# Altium PCB Central_Unit_AgOpenGPS.pcbdoc (part 2 of 4)
Units mm, origin at the board's own origin, x right, y up, seen from the top; angles counter-clockwise.
Board outline 200.19 x 122.57 mm, 2 copper layers (Top Layer, Bottom Layer); 278 components, 223 nets, 1042 pads, 421 vias.
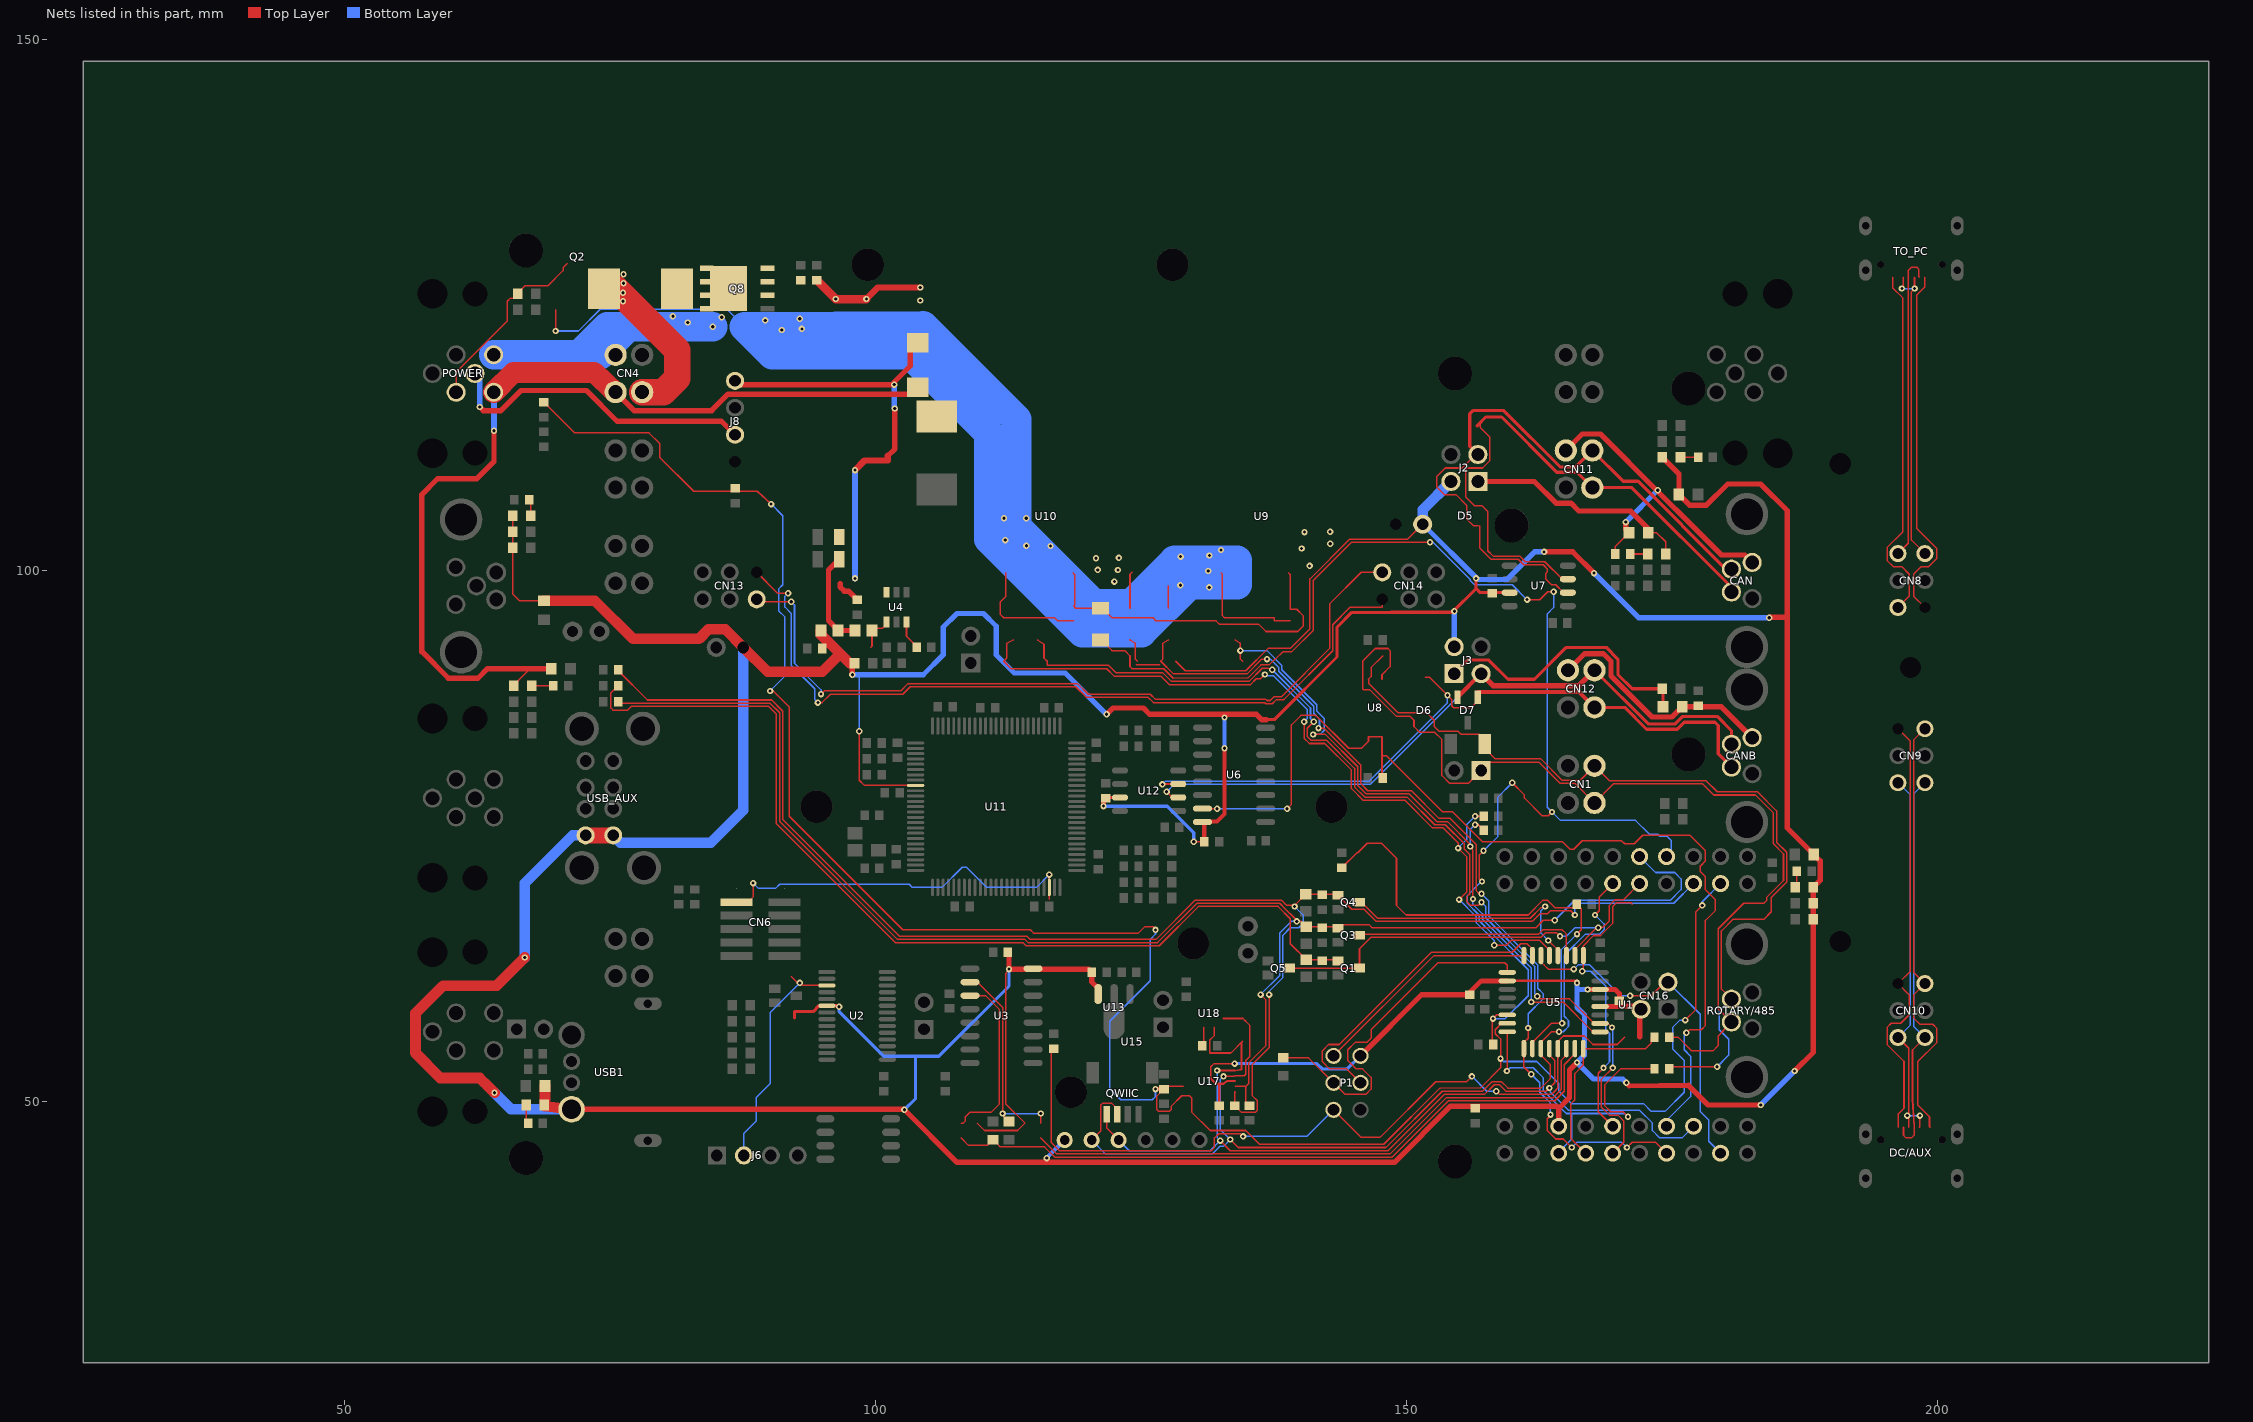
[diagram p2: the nets of this part, all layers, seen from the top]

## Via types
v1: diameter 0.6, hole 0.3, Top Layer to Bottom Layer, 420 vias
v2: diameter 0.61, hole 0.305, Top Layer to Bottom Layer, 1 vias

## Nets (pads, with @x,y where several pads share a name; then routed paths per layer and width w, separated by ;. In a path a pad name is that pad's centre, name@x,y a point inside that pad or via, vN(x,y) a via of type N, cw(c..) or ccw(c..) an arc to the next point about the centre after c; other vN are vias at no path point) (continued)
+5V: 5V.2 C2.1 C4.1 C11.1 C14.1 C22.1 C26.1 C34.1 C35.1 C40.1 C53.1 C56.1 CHA.2 CHB.2 CN7.1 CN16.2 F1.2 F5.1 F6.1 F7.1 FGNSS.1 FROT.1 FSER.1 FWAS.1 J1.2 J2.2 J3.2 L8.2 P1.2 R6.2 R22.2 R23.2 R48.1 U1.31 U2.20 U3.16 U5.4 U5.6 U5.18 U6.16 U7.3 U11.9 U12.3 U13.3 U15.1 U17.8 USB1.1 USB_AUX.1 USB_AUX.5 WAS1.2 WAS2.2 | length 679.6
  Top Layer w0.145: FWAS.1@65.837,105.166 65.837,97.815 66.488,97.165 F5.1@68.786,97.165 ; FGNSS.1@68.837,49.666 68.887,49.716 F1.2@68.887,51.466 ; v1(98.486,84.866) 98.486,80.267 98.987,79.766 U11.9@103.787,79.766 ; R22.2@109.587,47.966 110.287,47.266 110.487,47.266 ; R48.1@128.287,91.466 129.187,90.566 134.887,90.566 136.988,92.667 139.088,92.667 140.937,94.516 140.937,99.217 144.687,102.967 150.158,102.967 J1.2@151.557,104.366 ; v1(129.987,74.466) C4.1@130.987,74.466 ; 131.588,52.167 131.588,53.266 131.887,53.566 v1(133.837,53.566) ; CHB.2@188.337,67.166 188.337,70.166 188.887,70.716 188.887,72.766 F6.1@188.387,73.266
  Top Layer w0.15: 110.487,47.266 113.388,47.266 R23.2@114.087,47.966 112.286,49.766 112.287,62.066 v1(112.587,62.466) 112.632,62.511 U3.16@114.859,62.511
  Top Layer w0.2: 131.587,52.166 132.087,51.666 132.787,51.666 133.138,51.917 U17.8@133.89,51.917 ; C14.1@132.387,49.616 132.387,51.634 132.419,51.666
  Top Layer w0.25: U5.18@159.518,61.356 166.089,61.356 v1(166.087,61.166)
  Top Layer w0.3: C26.1@92.387,57.866 92.388,58.466 94.138,58.466 94.689,59.019 U2.20@95.442,59.018 ; U2.20@95.442,59.018 96.541,59.018 96.587,58.972 v1(96.587,58.916) ; C40.1@121.687,78.566 121.752,78.631 U12.3@123.047,78.631 ; 136.924,85.966 137.587,85.966 143.488,91.867 143.488,94.666 144.887,96.065 148.588,96.065 ; 148.588,96.075 154.346,96.075 156.586,98.316 ; v1(156.587,99.266) 156.586,98.316 ; U7.3@159.33,97.927 156.975,97.927 156.586,98.316
  Top Layer w0.4: U6.16@130.815,76.321 U6.16@130.987,76.149 ; C4.1@130.987,74.466 U6.16@130.987,76.149 ; v1(132.887,83.266) 132.888,77.066 132.187,76.365 130.988,76.365 U6.16@130.988,76.149
  Top Layer w0.45: C22.1@155.987,60.066 155.987,60.267 157.077,61.356 U5.18@159.518,61.356 ; U5.4@168.255,58.948 170.087,58.948 170.087,60.166 169.688,60.546 ; U5.6@168.255,60.546 169.667,60.546
  Top Layer w0.5: 70.087,49.167 70.386,49.266 102.688,49.266 107.686,44.267 148.888,44.267 154.186,49.566 164.148,49.566 164.366,49.347 ; v1(97.837,90.191) 5V.2@97.837,91.266 ; C35.1@112.487,64.066 112.587,63.966 v1(112.587,62.466) 120.087,62.466 C53.1@120.387,62.166 ; C53.1@120.386,62.166 120.386,61.265 120.988,60.665 U13.3@120.988,60.114 ; v1(121.487,77.816) 121.487,78.366 C40.1@121.687,78.566 ; v1(121.787,86.466) 122.387,87.066 125.252,87.066 125.851,86.466 135.887,86.466 136.387,85.966 136.837,85.966 ; P1.2@145.699,54.298 151.467,60.066 C22.1@155.987,60.066 ; v1(162.987,101.766) 165.687,101.766 v1(167.687,99.766) ; U1.31@164.366,47.666 164.366,49.347 ; v1@166.086,53.665 165.388,52.967 165.388,50.366 164.366,49.347 ; v1(167.087,60.547) U5.6@168.256,60.547 ; C34.1@170.087,59.466 170.087,58.966 171.885,58.966 171.986,58.864 171.986,56.065 ; v1(170.737,51.766) 170.987,51.466 176.586,51.516 178.438,49.667 v1(183.387,49.666) ; FSER.1@174.137,110.666 175.687,109.116 F7.1@175.687,107.166 176.688,106.167 178.288,106.167 180.287,108.166 183.388,108.166 185.888,105.667 185.888,75.766 F6.1@188.387,73.266 188.987,72.666 188.987,70.816 188.337,70.166 188.337,54.616 ; v1(184.187,95.566) 184.23,95.608 185.888,95.608 ; v1(186.587,52.866) 188.337,54.616 ; 188.337,55.481 188.337,54.616
  Top Layer w1: 62.711,52.21 63.478,51.476 v1(64.137,50.816) ; 62.737,52.216 59.038,52.215 56.688,54.564 56.688,58.316 59.287,60.917 64.339,60.917 v1(66.987,63.566) ; F5.1@68.786,97.165 73.587,97.165 77.186,93.566 83.386,93.566 84.288,94.465 85.858,94.465 CN7.1@87.557,92.766 89.858,90.465 94.986,90.465 96.688,92.166 ; F1.2@68.887,51.466 68.888,49.566 USB1.1@71.387,49.266 ; L8.2@94.887,94.366 94.887,93.966 96.687,92.166 ; 5V.2@97.837,91.266 97.587,91.266 96.687,92.166
  Top Layer w1.5: USB_AUX.1@72.712,75.066 USB_AUX.5@75.313,75.066
  Bottom Layer w0.145: v1(98.486,84.866) 98.486,90.191
  Bottom Layer w0.3: v1(96.587,58.916) 96.587,58.466 100.787,54.266 105.987,54.266 112.587,60.866 v1(112.587,62.466) ; v1(102.737,49.216) 103.787,50.266 103.787,54.266 ; v1@121.486,77.815 127.488,77.815 129.988,75.316 v1(129.987,74.466) ; v1(133.837,53.566) 141.587,53.566 142.087,53.066 144.467,53.066 P1.2@145.699,54.298
  Bottom Layer w0.4: v1(116.137,44.666) U15.1@117.837,46.366 ; v1(132.887,83.266) v1(132.887,86.166)
  Bottom Layer w0.5: v1@97.836,90.19 104.514,90.19 106.388,92.065 106.388,94.666 107.686,95.966 110.188,95.966 111.387,94.765 111.387,92.065 113.086,90.366 117.887,90.366 v1(121.787,86.466) ; J1.2@151.557,104.366 156.757,99.167 159.487,99.167 162.088,101.765 v1(162.987,101.766) ; J3.2@154.517,92.836 154.537,92.856 v1(154.537,96.166) ; 166.087,60.566 v1(166.087,61.166) ; v1(167.087,60.547) 166.205,60.546 166.086,60.665 166.086,58.867 166.787,58.166 166.787,54.366 166.086,53.665 167.635,52.116 170.386,52.116 v1(170.737,51.766) ; v1(167.687,99.766) 171.887,95.566 v1(184.187,95.566) ; v1(183.387,49.666) v1@186.587,52.866
  Bottom Layer w1: v1(64.137,50.816) 65.687,49.266 USB1.1@71.387,49.266 ; v1(66.987,63.566) 66.988,70.566 71.486,75.065 USB_AUX.1@72.712,75.066 ; USB_AUX.5@75.311,75.065 75.987,74.366 84.486,74.366 87.557,77.437 CN7.1@87.557,92.766 ; J1.2@151.557,104.366 151.557,105.736 J2.2@154.217,108.396
  other v1: 166.087,53.666
+BATT: CN4.2 D2.2 D3.1 F4.1 FINP.1 POWER.1 | length 90.3
  Top Layer w0.145: FINP.1@65.937,89.166 65.937,89.216 67.487,90.766 F4.1@69.487,90.766
  Top Layer w0.5: v1(64.087,113.166) 64.087,110.266 62.487,108.666 58.786,108.666 57.288,107.165 57.288,92.367 59.787,89.865 62.586,89.865 63.488,90.767 F4.1@69.487,90.766 ; CN4.2@75.538,116.817 77.288,115.067 84.588,115.067 86.137,116.616 103.338,116.616 D3.1@103.987,117.266
  Top Layer w2: POWER.1@64.054,116.797 65.924,118.666 73.513,118.666 CN4.2@75.487,116.817
  Bottom Layer w0.6: POWER.1@64.055,116.798 64.087,116.766 v1(64.087,113.166)
+MOTOR: C30.2 C31.1 CN4.1 D1.2 MOT.2 POWER.4 Q2.2 R35.1 R51.2 R53.2 U9.7 U10.7 | length 48.3
  Top Layer w0.145: POWER.4@60.519,116.798 60.519,118.697 65.337,123.515 65.337,125.367 65.639,125.666 66.338,125.666 MOT.2@66.337,126.066 ; MOT.2@66.338,126.073 66.338,126.167 66.988,126.815 69.137,126.815 70.587,128.266 70.587,128.521 Q2.2@70.971,128.905 ; R53.2@123.987,96.466 123.988,99.667 C30.2@124.187,99.866
  Top Layer w0.6: v1(99.155,125.578) 100.243,126.666 v1(104.237,126.666)
  Top Layer w0.8: R35.1@94.487,127.366 v1(96.275,125.578) v1(99.155,125.578)
  Top Layer w2.5: D1.2@74.452,126.566 75.537,126.566 81.352,120.751 81.352,118.13 80.038,116.817 CN4.1@78.037,116.816
  other v1: 122.517,98.967 122.842,100.062 120.947,100.072 140.904,100.444 120.779,101.161 122.939,101.198 140.152,102.081 142.842,102.524 140.425,103.624 142.833,103.662 76.237,125.366 104.238,125.44 76.237,126.166 76.287,127.066 76.287,127.916
+SMPS: C20.2 C21.2 L7.2 L8.1 R17.2 | length 9.6
  Top Layer w0.5: C20.2@96.688,101.166 95.588,100.063 95.587,95.316 L8.1@96.487,94.366 ; L8.1@96.787,94.272 96.586,94.267 L8.1@96.487,94.366 ; R17.2@98.087,94.366 L8.1@96.487,94.366
+VIN: C17.2 C18.2 C19.2 C32.1 D3.2 J8.4 U4.3 | length 43.9
  Top Layer w0.5: J8.4@86.787,117.876 87.148,117.516 v1(101.787,117.516) ; C17.2@96.687,98.766 96.688,98.466 97.087,98.067 97.488,98.067 C19.2@98.287,97.266 ; 101.187,110.816 101.837,111.466 v1(101.837,115.266) ; v1@101.786,117.516 101.786,117.767 103.287,119.266 103.287,121.465 D3.2@103.987,121.466
  Top Layer w0.6: v1(98.087,109.466) 98.987,110.366 101.186,110.366 101.186,110.815
  Bottom Layer w0.5: v1(101.787,117.516) 101.787,115.316 v1(101.837,115.266)
  Bottom Layer w0.6: v1(98.087,99.266) v1(98.087,109.466)
-MIN: CN4.4 D1.1 POWER.2 Q8.5 Q8.6 Q8.7 Q8.8 | length 27.4
  Bottom Layer w2.8: POWER.2@64.054,120.335 74.067,120.335 76.698,122.966 ; 72.162,120.348 74.793,122.979 ; 74.76,122.966 76.698,122.966 ; v1(84.687,122.966) 76.698,122.966
  other v1: 82.337,123.366 85.537,123.866 80.937,123.966
-MOTOR: C30.1 C31.2 Q8.2 Q8.3 Q8.4 R11.1 R12.1 R20.2 R21.2 R39.1 R49.1 R54.2 U9.1 U10.1 | length 178.8
  Top Layer w0.145: U10.1@112.277,99.782 112.277,97.556 111.787,97.066 111.787,95.866 112.087,95.566 116.888,95.566 R21.2@117.187,95.266 R20.2@118.687,95.266 ; R54.2@127.587,96.466 127.587,98.566 ; U9.1@132.577,99.782 132.688,99.672 132.688,95.766 132.888,95.565 137.587,95.565 R11.1@137.587,95.266 ; R11.1@137.587,95.266 R12.1@139.087,95.266
  Top Layer w0.15: v1(69.887,122.566) R49.1@69.887,124.566
  Bottom Layer w0.15: v1(69.887,122.566) 72.037,122.566 74.087,124.616 83.637,124.616 86.037,124.616 87.686,122.966
  Bottom Layer w2.8: 87.686,122.966 90.287,120.366 103.287,120.366 110.686,112.966 110.686,102.967 119.487,94.165 125.085,94.165 129.586,98.666 134.087,98.666 134.087,100.965 128.187,100.965 124.087,96.865 120.587,96.865 113.287,104.165 113.287,114.267 104.487,123.066 87.686,122.966
  other v1: 131.452,98.424 128.734,98.618 131.349,99.96 128.756,101.316 131.461,101.418 132.555,101.948 116.504,102.317 114.229,102.334 112.229,102.872 112.115,104.932 114.215,104.929 91.187,122.666 93.087,122.766 89.637,123.566 92.887,123.716
.8V: R17.1 R18.2 U4.4 | length 3.5
  Top Layer w0.145: R18.2@99.587,92.766 99.687,92.865 R17.1@99.687,94.366 99.887,94.566 100.687,94.566 101.037,94.915 U4.4@101.037,95.166
_RESET: C7.1 P1.5 R6.1 U5.29 | length 75.3
  Top Layer w0.145: C7.1@116.787,54.966 116.586,54.966 116.586,46.116 117.338,45.367 131.639,45.367 131.938,45.667 131.938,46.566 132.337,46.965 134.389,46.965 v1(134.637,46.716) ; P1.5@143.159,49.218 145.761,46.617 147.536,46.617 152.787,51.867 155.687,51.867 v1(156.187,52.366) ; v1(158.487,50.966) 158.787,50.666 160.387,50.666 163.687,50.666 163.887,50.866 164.281,51.26 U5.29@164.281,54.984 164.281,55.66 164.787,56.166 166.787,56.166 167.587,55.366 169.887,55.366 R6.1@170.587,56.066
  Bottom Layer w0.145: v1(134.637,46.716) 140.657,46.716 P1.5@143.159,49.218 ; v1(156.187,52.366) 157.587,50.966 v1(158.487,50.966)
_RESETNXP: CN6.10 U11.48 | length 35.8
  Top Layer w0.145: CN6.10@86.937,68.771 87.992,68.771 88.487,69.266 v1(88.487,70.566) ; 116.387,69.066 U11.48@116.387,70.166 v1(116.387,71.366)
  Bottom Layer w0.145: v1(88.487,70.566) 88.987,70.066 90.587,70.066 90.988,70.465 103.188,70.465 103.488,70.165 106.287,70.165 108.187,72.065 108.588,72.065 110.488,70.165 115.187,70.165 v1(116.387,71.366)
_RXD: R9.2 RXD.1 U3.2 | length 19.6
  Top Layer w0.145: U3.2@108.915,61.241 109.613,61.241 111.987,58.867 111.987,48.715 RXD.1@112.586,48.115 ; R9.2@115.587,47.966 v1@115.587,48.866
  Bottom Layer w0.145: v1(111.987,48.866) v1(115.587,48.866)
_TXD: R7.1 U3.3 | length 16.8
  Top Layer w0.145: R7.1@108.087,47.966 108.288,47.965 108.486,48.166 108.486,48.565 108.888,48.966 110.887,48.966 111.687,49.767 111.687,58.666 110.382,59.971 U3.3@108.915,59.971
_URES: J6.2 R34.1 U2.17 | length 22.1
  Top Layer w0.145: R34.1@92.087,61.766 92.688,61.166 v1(92.887,61.166) 93.087,60.966 95.4,60.966 U2.17@95.442,60.923
  Bottom Layer w0.145: J6.2@87.617,44.916 87.618,46.995 88.786,48.166 88.786,50.366 90.087,51.666 90.087,58.367 v1(92.887,61.166)
A: CN1.4 D6.1 J4.1 R32.1 R37.1 R90.1 ROTARY/485.4 U8.6 | length 90.3
  Top Layer w0.145: R37.1@146.387,91.966 147.087,92.666 148.287,92.666 148.487,92.466 148.487,90.966 147.722,90.201 U8.6@147.722,89.786 ; R37.1@146.387,91.966 145.888,91.465 145.888,88.867 145.987,88.765 146.586,88.765 149.088,86.266 150.386,86.266 150.737,85.915 D6.1@150.737,85.666 150.737,85.316 151.288,84.765 152.688,84.765 153.363,84.089 153.363,80.691 154.087,79.967 155.857,79.967 157.056,81.166 157.056,81.966 162.487,81.966 164.488,79.967 165.888,79.967 CN1.4@167.737,78.116 169.538,79.916 177.912,79.916 178.961,78.867 182.888,78.867 184.587,77.165 184.587,74.265 185.537,73.317 185.537,70.815 183.945,69.223 183.945,68.923 R32.1@183.687,68.666 181.788,68.666 179.388,66.266 179.388,58.74 ROTARY/485.4@180.637,57.491 ; R90.1@174.787,56.066 175.588,56.065 176.886,54.765 178.888,54.765 179.388,55.265 179.388,56.167 ROTARY/485.4@180.427,57.28
A0/WAS: C9.2 R13.1 R97.2 U1.6 U5.23 U17.4 | length 212.9
  Top Layer w0.145: R97.2@68.787,115.866 71.687,112.966 78.687,112.966 79.687,111.966 79.687,110.666 82.888,107.465 87.934,107.465 ; R13.1@86.787,107.766 86.787,107.465 88.887,107.466 v1(90.187,106.266) ; v1(90.087,88.666) 90.386,88.666 91.888,87.165 91.888,76.865 102.586,66.167 114.588,66.167 114.887,65.865 124.304,65.863 ; 124.306,65.862 124.783,65.862 125.39,66.469 126.183,66.469 126.388,66.266 v1(126.387,66.166) ; C9.2@127.186,51.166 126.487,50.465 126.487,49.266 126.688,49.065 127.686,49.065 127.887,49.266 127.887,49.566 128.862,50.541 129.594,50.541 129.787,50.345 129.787,49.017 131.537,47.267 134.887,47.267 136.188,45.966 147.889,45.966 153.188,51.265 156.993,51.272 158.888,53.167 158.888,55.885 158.387,56.385 158.387,56.766 158.982,57.358 U5.23@159.518,57.358 ; C9.2@127.187,51.166 127.438,51.417 U17.4@128.988,51.416 ; v1(176.287,57.666) 177.287,58.666 177.287,67.866 v1(177.887,68.466)
  Top Layer w0.4: v1(126.387,51.166) C9.2@127.187,51.166
  Bottom Layer w0.145: v1(90.087,88.666) 91.486,90.066 91.486,95.623 90.887,96.223 90.887,98.265 91.288,98.666 91.288,105.166 v1(90.187,106.266) ; v1(126.387,51.166) 126.388,50.465 126.084,50.162 123.112,50.162 122.086,51.189 122.086,57.564 125.885,61.364 125.885,65.263 126.388,65.766 v1(126.387,66.166) ; v1(158.888,54.037) 159.159,53.767 162.286,53.767 164.387,51.666 164.387,50.968 165.588,49.766 172.388,49.766 173.086,49.065 174.387,49.065 176.188,50.866 176.188,53.866 175.088,54.966 175.088,56.967 175.786,57.666 v1(176.287,57.666) ; v1(177.887,68.466) 177.887,68.806 U1.6@179.607,70.526
A1/CH_B: R91.2 U1.32 U5.24 | length 33.5
  Top Layer w0.145: v1(159.487,52.866) 159.518,52.866 U5.24@159.518,56.559 ; v1(170.887,48.566) 170.412,49.041 169.262,49.041 168.687,49.616 168.687,51.565 170.188,53.066 R91.2@173.386,53.066
  Bottom Layer w0.145: v1(159.487,52.866) 159.792,53.17 161.966,53.17 162.888,52.248 162.888,51.067 165.085,48.867 166.452,48.867 ; U1.32@164.366,45.787 164.366,45.126 164.366,45.245 165.588,46.467 165.588,48.867 170.587,48.867 v1(170.887,48.566)
A2/SAFESENSE: R25.1 R48.2 R53.1 R54.1 U1.16 U5.25 | length 91.9
  Top Layer w0.145: R53.1@123.987,93.466 124.486,93.165 124.486,91.666 R25.1@124.687,91.466 ; 124.588,91.116 126.787,91.116 ; R54.1@127.587,93.466 127.087,93.165 127.087,91.666 126.886,91.465 128.085,90.267 135.007,90.267 136.406,91.666 v1@136.886,91.666 ; v1(141.737,85.166) 142.238,85.166 145.738,81.666 145.738,79.916 146.388,79.266 150.488,79.266 153.089,76.665 154.148,76.665 156.586,74.224 156.586,69.865 156.886,69.566 v1(157.087,69.566) ; v1@161.486,56.916 161.486,55.966 161.082,55.562 161.082,54.983 161.083,53.27 v1(161.787,52.566) ; v1(163.587,48.766) 163.587,48.666 163.287,48.367 163.287,47.267 164.087,46.467 164.788,46.467 v1(165.587,45.666) ; v1(170.787,45.666) 171.287,46.166 171.587,46.166 173.487,46.166 U1.16@174.527,45.126
  Bottom Layer w0.145: v1@136.886,91.666 137.186,91.666 137.986,90.866 137.986,90.515 141.288,87.216 141.288,86.566 141.837,86.017 141.837,85.217 141.887,85.166 v1(141.737,85.166) ; v1(157.087,69.566) 157.788,68.864 157.788,67.465 162.388,62.865 162.388,60.665 162.888,60.165 162.888,59.665 161.486,58.265 v1@161.486,56.916 ; v1(161.787,52.566) 162.587,51.766 162.588,50.863 163.587,49.865 v1(163.587,48.766) ; v1(165.587,45.666) 166.089,46.167 170.287,46.167 v1(170.787,45.666)
  other v1: 161.487,56.916 136.887,91.666
A3/OUT: R33.2 R77.1 R94.2 U5.26 | length 45.6
  Top Layer w0.145: R77.1@143.937,72.016 145.337,73.416 R33.2@145.437,73.416 146.337,74.316 147.686,74.315 149.088,72.913 149.088,70.665 ; 149.087,70.666 149.087,68.466 149.987,67.566 161.487,67.566 162.887,68.966 163.296,68.966 163.996,68.266 166.387,68.266 166.487,68.166 166.487,66.166 v1(166.087,65.766) ; U5.26@161.883,54.984 161.883,55.562 163.687,57.366 v1(164.687,57.366)
  Bottom Layer w0.145: v1(164.687,57.366) 164.587,57.366 164.587,64.267 v1(166.087,65.766)
A4/SDA: QWIIC.3 R30.1 U1.22 U5.27 U15.2 U17.9 U18.6 | length 94.4
  Top Layer w0.145: U15.2@120.376,46.365 121.237,47.226 121.237,49.665 121.387,49.817 122.286,49.817 122.787,49.317 QWIIC.3@122.787,48.816 ; v1(132.787,52.366) 133.84,52.366 U17.9@133.89,52.416 ; U18.6@132.789,57.816 134.538,57.816 R30.1@134.587,57.866 ; v1(133.437,46.416) 134.186,45.667 148.088,45.667 153.386,50.965 157.188,50.965 158.09,51.867 158.987,51.867 159.589,51.265 162.685,51.265 163.587,52.167 163.587,53.464 162.682,54.369 U5.27@162.682,54.983 ; 133.889,52.415 134.737,52.415 134.887,52.565 134.887,53.866 135.286,54.265 135.286,57.165 R30.1@134.587,57.866 ; 134.887,57.566 R30.1@134.587,57.866 ; U5.27@162.683,54.984 162.683,55.562 163.687,56.566 v1(164.387,56.566) ; v1(167.787,67.566) 168.187,67.966 168.187,69.266 U1.22@169.446,70.526
  Bottom Layer w0.145: U15.2@120.377,46.366 121.677,45.066 131.737,45.066 132.437,45.766 132.787,45.766 v1(133.437,46.416) 132.487,47.366 132.487,52.065 v1(132.787,52.366) ; v1(164.387,56.566) 164.788,56.566 165.288,57.066 165.288,57.62 164.887,58.021 164.887,63.767 166.886,65.766 168.171,65.766 168.237,65.766 168.637,66.166 168.637,66.716 v1(167.787,67.566)
A5/SCL: QWIIC.4 R29.1 U1.11 U5.28 U15.3 U17.10 U18.4 | length 86.2
  Top Layer w0.145: QWIIC.4@121.787,48.816 121.787,47.496 U15.3@122.917,46.366 ; 131.938,56.967 131.938,56.218 131.486,55.766 131.486,54.567 133.488,54.567 R29.1@134.587,55.666 ; v1(132.187,52.916) U17.10@133.89,52.917 134.488,53.014 134.488,55.567 R29.1@134.587,55.666 ; v1(132.487,46.316) 133.437,45.367 148.288,45.367 153.587,50.665 157.387,50.665 158.288,51.567 158.786,51.567 159.388,50.965 163.185,50.965 v1(163.487,51.266) 163.983,51.763 163.983,53.868 163.483,54.369 U5.28@163.483,54.983
  Bottom Layer w0.145: U15.3@122.917,46.366 123.917,45.366 131.537,45.366 v1(132.487,46.316) 132.187,46.616 v1(132.187,52.916) ; v1(163.487,51.266) 163.587,50.866 165.286,49.167 171.986,49.167 173.188,47.965 173.188,47.267 173.886,46.566 175.967,46.566 U1.11@177.066,47.666
A7/CURRSEN: C57.2 R28.1 U1.13 U5.22 | length 129.1
  Top Layer w0.145: R28.1@121.187,93.466 121.288,93.467 122.286,92.466 123.488,92.466 123.988,91.966 123.988,90.965 124.186,90.767 127.163,90.767 128.065,89.865 135.09,89.888 136.317,91.115 137.087,91.115 138.39,92.37 139.241,92.37 141.237,94.366 141.237,99.065 144.836,102.667 v1(152.237,102.667) ; v1(157.137,70.716) 156.884,70.969 156.884,73.212 v1(157.287,73.616) ; C57.2@158.336,55.115 158.288,55.065 158.088,55.265 158.088,57.716 v1(158.176,57.805) 158.53,58.158 U5.22@159.518,58.158 ; v1(159.987,80.016) 161.137,78.866 161.137,78.574 162.796,76.916 163.387,76.916 v1(163.737,77.266) ; v1(161.387,97.266) 162.587,97.266 163.337,98.016 v1(163.887,98.016)
  Bottom Layer w0.145: v1(152.237,102.667) 152.535,102.667 156.038,99.167 156.038,99.065 156.437,98.666 159.987,98.666 v1(161.387,97.266) ; v1(157.137,70.716) 156.987,70.566 156.937,70.566 155.737,69.366 155.737,68.697 156.887,67.547 156.887,67.016 157.987,65.916 161.486,62.417 161.486,59.967 159.327,57.805 v1(158.176,57.805) ; v1(157.287,73.616) 158.637,74.966 158.637,78.666 v1(159.987,80.016) ; v1(163.887,98.016) 163.886,96.515 163.284,95.913 163.284,77.719 164.537,76.467 171.608,76.467 172.906,75.166 173.688,75.166 173.886,74.966 174.587,74.966 174.986,74.567 174.986,73.525 U1.13@174.526,73.066
A/RTSW: C24.2 C27.2 Q4.1 R36.2 R40.2 U1.10 U17.6 | length 149.4
  Top Layer w0.145: R40.2@75.787,90.666 75.786,90.566 78.537,87.815 90.237,87.816 ; 90.237,87.815 91.288,86.764 91.288,76.563 102.286,65.565 114.288,65.565 114.588,65.265 126.437,65.265 130.14,68.969 138.237,68.969 138.74,68.466 139.482,68.466 R36.2@140.53,69.515 143.482,69.515 Q4.1@143.571,69.426 144.882,68.115 146.02,68.115 147.168,66.967 161.887,66.967 162.586,67.666 163.287,67.666 163.587,67.965 165.489,67.965 v1(165.887,67.566) ; C24.2@133.838,49.616 134.491,48.966 135.786,48.966 135.987,49.167 135.987,50.066 135.487,50.566 135.487,53.467 137.087,55.065 v1(137.087,60.066) ; C24.2@133.839,49.617 133.839,50.866 U17.6@133.89,50.917
  Bottom Layer w0.145: v1(137.087,60.066) 137.087,60.366 138.387,61.666 138.387,65.667 139.086,66.365 139.888,66.365 140.287,66.766 140.287,67.567 v1(139.487,68.366) ; v1(165.887,67.566) 165.888,68.466 166.086,68.666 175.207,68.666 U1.10@177.066,70.526
A/WKSW: C25.2 C29.2 Q3.1 R45.2 R47.2 U1.17 U17.7 | length 147.2
  Top Layer w0.145: R45.2@75.787,87.666 75.786,87.516 90.087,87.516 90.988,86.614 90.988,76.365 102.088,65.265 114.087,65.265 114.387,64.966 126.586,64.966 130.292,68.671 138.083,68.671 138.588,68.166 ; 133.889,51.417 134.887,51.417 ; C25.2@135.239,49.617 134.887,49.969 134.887,51.417 ; v1(136.287,60.066) 136.787,59.566 136.787,55.265 135.187,53.665 135.187,51.717 134.887,51.417 ; 138.359,68.395 139.687,67.067 v1(139.687,66.966) ; v1(139.687,66.966) 140.089,66.965 R47.2@140.587,66.466 ; R47.2@140.587,66.466 143.431,66.466 Q3.1@143.571,66.326 ; Q3.1@143.571,66.326 143.693,66.327 144.031,66.665 146.487,66.665 146.787,66.365 162.218,66.365 162.919,67.066 v1(163.987,67.066)
  Bottom Layer w0.145: v1(136.287,60.066) 138.087,61.866 138.087,65.866 139.187,66.966 v1(139.687,66.966) ; v1(163.987,67.066) 165.885,68.964 174.885,68.964 175.888,69.967 175.888,70.965 175.288,71.567 173.488,71.567 U1.17@171.986,73.066
AUX: J8.2 POWER.5 | length 30
  Top Layer w0.5: v1(62.737,115.416) 63.086,115.065 64.737,115.065 66.64,116.967 72.787,116.967 75.687,114.066 85.517,114.066 J8.2@86.787,112.796
  Bottom Layer w0.5: POWER.5@62.287,118.566 62.737,118.116 v1(62.737,115.416)
B: CN1.2 D6.2 R31.1 R38.1 R91.1 R92.2 ROTARY/485.2 U8.7 | length 83.8
  Top Layer w0.145: U8.7@146.452,89.786 146.688,90.02 146.688,90.866 R38.1@147.787,91.966 ; U8.7@146.452,89.786 146.452,89.401 149.259,86.595 151.958,86.595 152.637,85.916 D6.2@152.637,85.666 ; D6.2@152.637,85.666 152.637,85.316 153.086,84.866 154.887,84.866 155.187,84.567 156.886,84.567 157.387,84.066 R92.2@157.387,83.666 ; R92.2@157.087,82.865 157.785,82.865 158.387,82.266 162.687,82.266 164.686,80.267 166.386,80.267 CN1.2@167.737,81.616 169.137,80.216 173.554,80.216 173.58,80.216 ; 173.237,80.216 173.188,80.216 178.237,80.216 179.286,79.167 183.086,79.167 184.887,77.366 184.887,74.417 185.837,73.467 185.837,70.665 184.387,69.215 184.387,67.866 R31.1@183.687,67.166 180.787,67.166 179.687,66.066 179.687,60.591 ROTARY/485.2@180.637,59.641 ; R91.1@174.787,53.066 174.788,53.266 v1(179.287,53.266)
  Bottom Layer w0.145: v1(179.287,53.266) 180.386,54.366 180.386,55.867 179.487,56.766 179.487,58.489 ROTARY/485.2@180.638,59.639
C8_2: C8.2 U18.2 | length 1.8
  Top Layer w0.145: C8.2@130.787,55.266 130.939,55.418 U18.2@130.939,56.966
C16_1: C16.1 U4.6 | length 2.8
  Top Layer w0.145: U4.6@102.937,95.166 102.937,93.817 103.887,92.866 C16.1@103.887,92.766
C28_2: C28.2 Q1.1 R41.2 R44.2 | length 91.7
  Top Layer w0.145: R41.2@75.787,89.166 75.088,88.466 75.088,87.066 75.286,86.865 76.688,86.865 77.036,87.216 89.937,87.216 ; 90.087,87.066 89.937,87.216 ; R44.2@140.587,63.366 139.088,64.867 139.088,67.216 137.938,68.367 130.437,68.367 126.736,64.666 114.186,64.666 113.886,64.966 101.888,64.966 90.686,76.167 90.686,86.467 89.937,87.216 ; R44.2@140.587,63.366 143.431,63.366 Q1.1@143.571,63.226
CAN+: CAN.1 CN11.1 F2.2 R71.2 | length 31.2
  Top Layer w0.145: R71.2@169.687,101.566 169.687,102.266 F2.2@170.987,103.566
  Top Layer w0.5: CN11.1@165.037,111.316 166.586,112.865 168.288,112.865 170.988,110.165 ; v1(170.687,104.566) 170.687,103.866 F2.2@170.987,103.566 ; CAN.1@182.587,100.766 181.887,101.465 179.683,101.465 171.036,110.112 ; 170.988,110.165 171.036,110.112 ; 170.988,110.165 171.036,110.112
  Bottom Layer w0.5: v1(170.687,104.566) v1(173.687,107.566)
CANB+: CANB.1 CN12.1 F3.2 R72.2 | length 22.9
  Top Layer w0.5: CN12.1@165.238,90.617 166.787,92.166 168.588,92.166 169.286,91.465 169.286,90.066 173.137,86.215 175.037,86.215 F3.2@175.987,87.166 179.688,87.165 CANB.1@182.587,84.266
CANH: CAN.4 CN11.4 D5.2 R60.1 U7.7 | length 55.3
  Top Layer w0.145: R60.1@156.987,113.766 156.988,113.467 157.887,112.565 157.887,110.366 157.188,109.667 155.784,109.667 155.588,109.471 155.588,106.967 156.437,106.116 D5.2@156.787,106.116 157.138,106.116 157.686,105.565 157.686,101.867 158.187,101.366 160.686,101.366 161.207,100.846 163.058,100.846 164.702,99.2 U7.7@165.227,99.201
  Top Layer w0.3: 156.698,113.652 157.511,114.465 158.987,114.465 164.186,109.266 166.089,109.266 CN11.4@167.537,107.816 171.237,107.815 180.638,98.415 CAN.4@180.637,97.991
CANH1: CANB.4 CN12.4 D7.1 R65.1 U12.7 | length 68.8
  Top Layer w0.145: v1@127.036,79.865 127.036,79.901 U12.7@128.527,79.901 ; R65.1@151.787,89.966 152.187,89.966 154.287,87.866 154.287,87.266 154.487,87.066 156.087,87.066 156.737,87.716 D7.1@156.737,88.066
  Top Layer w0.3: CN12.4@167.737,87.116 170.087,87.117 170.587,87.117 172.637,85.065 175.537,85.065 176.188,85.715 179.088,85.715 179.388,85.415 179.388,82.74 CANB.4@180.637,81.491
  Top Layer w0.4: D7.1@156.737,88.066 156.79,88.565 166.289,88.565 CN12.4@167.737,87.116
  Bottom Layer w0.145: v1@127.036,79.865 127.336,80.165 146.487,80.165 153.886,87.564 v1(153.887,88.266)
  other v1: 127.037,79.866
CANL: CAN.2 CN11.2 D5.1 J2.3 U7.6 | length 61.2
  Top Layer w0.145: J2.3@156.757,110.936 156.558,110.937 155.288,109.667 153.688,109.667 152.888,108.867 152.888,107.866 153.587,107.165 154.686,107.165 155.687,106.167 155.687,104.866 156.337,104.216 D5.1@156.787,104.216 ; 156.934,104.216 156.934,102.118 157.988,101.067 160.562,101.067 161.08,100.548 162.906,100.548 163.287,100.165 163.287,99.865 163.157,99.736 163.157,99.195 163.688,98.666 164.087,98.666 164.821,97.93 U7.6@165.227,97.931
  Top Layer w0.3: J2.3@156.757,110.936 155.987,111.706 155.987,114.765 156.287,115.067 159.187,115.067 164.488,109.766 165.987,109.766 167.536,111.316 170.437,108.415 171.839,108.415 180.112,100.142 CAN.2@180.637,100.141
CANL1: CANB.2 CN12.2 D7.2 J3.3 U12.6 | length 68.1
  Top Layer w0.145: v1(127.437,79.166) 127.973,78.631 U12.6@128.527,78.631
  Top Layer w0.3: CN12.2@167.737,90.616 172.789,85.565 175.337,85.565 176.038,86.266 179.286,86.266 180.638,84.915 CANB.2@180.637,83.641
  Top Layer w0.4: D7.2@154.836,88.067 J3.3@157.056,90.297 ; D7.2@154.837,88.066 155.241,88.473
  Top Layer w0.5: J3.3@157.057,90.296 158.187,89.166 166.286,89.166 CN12.2@167.737,90.616
  Bottom Layer w0.145: v1(127.437,79.166) 128.137,79.865 146.625,79.865 J3.3@157.056,90.297
CC11: CN8.1 TO_PC.A5 | length 34
  Top Layer w0.145: TO_PC.A5@198.837,127.651 198.837,126.716 198.087,125.966 198.087,103.966 199.987,102.066 199.987,101.166 199.187,100.366 198.487,100.366 197.787,99.666 197.787,97.596 CN8.1@198.857,96.526
CC12: CN9.1 CN10.1 DC/AUX.A5 | length 41.2
  Top Layer w0.145: CN10.1@196.317,61.106 197.386,60.035 197.386,58.166 196.586,57.366 195.687,57.366 195.288,56.967 195.288,55.367 196.886,53.767 196.887,49.366 196.337,48.816 DC/AUX.A5@196.337,47.581 ; CN9.1@196.317,85.106 197.487,83.936 197.487,62.276 CN10.1@196.317,61.106
CC21: CN8.2 TO_PC.B5 | length 33.9
  Top Layer w0.145: TO_PC.B5@195.837,127.651 195.837,126.616 196.787,125.666 196.787,103.665 195.288,102.166 195.288,100.965 195.888,100.366 196.688,100.366 197.386,99.667 197.386,97.597 CN8.2@196.317,96.526
CC22: CN9.2 CN10.2 DC/AUX.B5 | length 41.7
  Top Layer w0.145: CN10.2@198.857,61.106 197.788,60.035 197.788,57.866 198.387,57.267 199.586,57.267 199.987,56.866 199.987,55.565 198.187,53.764 198.187,49.667 199.286,48.565 199.286,47.63 DC/AUX.B5@199.337,47.581 ; CN9.2@198.857,85.106 197.787,84.036 197.787,62.176 CN10.2@198.857,61.106
CN13_1: CN13.1 CN14.1 | length 75.9
  Top Layer w0.145: 88.827,99.836 90.797,97.866 v1(91.787,97.866) ; v1(94.587,87.566) 94.986,87.566 95.786,88.367 102.586,88.367 103.287,89.065 118.885,89.065 119.883,88.067 125.687,88.067 126.188,87.566 135.388,87.566 136.668,87.566 136.767,87.465 137.387,87.465 137.747,87.826 138.448,87.826 138.512,87.889 ; 138.486,87.866 143.084,92.464 143.084,94.912 144.737,96.566 147.747,96.566 147.747,97.297
  Bottom Layer w0.145: v1(91.787,97.866) 91.486,97.566 91.486,96.566 92.088,95.964 92.088,91.067 94.288,88.867 94.288,87.866 v1(94.587,87.566)
CN13_2: CN13.2 CN14.2 | length 74.6
  Top Layer w0.145: CN13.2@88.827,97.296 89.057,97.066 v1(92.087,97.066) ; v1(94.887,88.366) 95.187,88.666 102.388,88.666 103.086,89.365 119.05,89.365 120.049,88.367 125.888,88.367 126.388,87.866 136.787,87.866 136.886,87.767 137.188,87.767 137.544,88.123 138.245,88.123 142.787,92.667 142.787,96.865 145.758,99.837 CN14.2@147.747,99.837
  Bottom Layer w0.145: v1(92.087,97.066) 92.387,96.766 92.387,91.266 94.887,88.766 v1(94.887,88.366)
CURRENTSENSE: R12.2 R20.1 R28.2 U9.6 U10.6 | length 32
  Top Layer w0.145: 118.687,96.666 118.887,96.466 R28.2@121.187,96.466 ; R28.2@121.187,96.466 121.387,96.467 122.286,95.565 126.172,95.565 126.416,95.265 132.088,95.265 132.388,94.966 136.086,94.966 136.787,94.267 139.787,94.267 140.287,94.765 140.287,95.766 139.688,96.365 139.088,96.365 139.088,96.667 ; U9.6@138.927,99.782 139.087,99.622 139.087,96.666
  Top Layer w0.15: U10.6@118.627,99.782 118.787,99.622 118.787,96.766 118.687,96.666
D0/RX: R9.1 U5.30 | length 56.2
  Top Layer w0.145: R9.1@115.587,46.566 117.087,45.065 148.486,45.065 153.787,50.366 163.843,50.366 164.587,51.11 164.587,53.866 165.08,54.359 U5.30@165.08,54.983
D1/TX: R7.2 TXD.1 U5.31 | length 65
  Top Layer w0.145: R7.2@108.087,46.566 108.787,45.866 110.537,45.866 TXD.1@111.087,46.416 111.138,46.416 111.763,45.715 115.941,45.715 116.894,44.765 148.687,44.765 153.988,50.066 163.988,50.066 164.887,50.965 164.887,53.467 165.88,54.46 U5.31@165.88,54.983
D2/CH_A: R90.2 U1.28 U5.32 | length 18.4
  Top Layer w0.145: U5.32@166.68,54.966 172.538,54.966 173.086,55.517 173.086,56.065 R90.2@173.386,56.065 ; U5.32@166.68,54.983 166.68,53.437 165.888,52.644 165.888,50.168 165.487,49.766 165.487,46.545 U1.28@166.906,45.126
D3/PWM0: R27.1 R55.1 R95.2 U5.1 | length 64.2
  Top Layer w0.145: R55.1@133.887,93.466 134.387,93.165 134.387,91.666 R27.1@134.587,91.466 ; v1(141.237,84.566) 142.388,84.567 145.438,81.516 145.438,79.766 146.236,78.966 150.285,78.966 152.883,76.368 153.886,76.368 156.038,74.216 v1(156.037,74.016) 156.287,73.666 156.287,72.784 ; v1(156.287,69.066) 156.287,72.967 ; v1(156.487,76.066) 156.787,76.066 R95.2@157.287,75.566 ; v1(161.787,59.366) 164.788,59.365 167.605,56.548 U5.1@168.255,56.548
  Bottom Layer w0.145: v1(134.387,92.466) 136.886,92.466 138.283,91.069 138.283,90.67 141.585,87.368 141.585,86.769 142.286,86.065 142.286,84.966 141.887,84.567 v1(141.237,84.566) ; v1(156.037,74.016) 156.037,75.616 v1(156.487,76.066) ; v1(156.287,69.066) 156.287,68.565 157.188,67.666 157.188,67.165 161.788,62.565 v1(161.787,59.366)
D4/INH: R42.1 R61.1 U1.24 U5.2 | length 94.2
  Top Layer w0.145: R61.1@115.287,93.466 115.887,93.066 115.887,91.766 R42.1@116.187,91.466 116.188,91.067 121.987,91.067 122.688,90.366 127.087,90.366 127.887,89.565 135.187,89.565 136.437,90.815 136.988,90.815 v1(137.387,90.666) ; v1(141.287,85.766) 140.683,85.161 140.683,84.366 141.034,84.016 142.487,84.016 145.136,81.366 145.136,79.616 146.086,78.666 150.087,78.666 152.688,76.065 153.688,76.065 155.487,74.267 155.487,73.767 155.987,73.266 155.987,69.566 155.687,69.266 155.687,68.867 156.086,68.466 156.787,68.466 v1(157.087,68.766) ; v1(162.337,59.916) 162.588,59.665 165.387,59.665 167.704,57.348 U5.2@168.255,57.348 ; U5.2@168.256,57.349 169.004,57.349 v1(169.387,56.966) ; U1.24@169.446,45.126 170.488,46.167 170.488,48.166 169.939,48.715 169.137,48.715 168.387,49.466 168.387,49.865 168.387,52.106 v1(169.447,53.166)
  Bottom Layer w0.145: v1(137.387,90.666) 140.988,87.064 140.988,86.063 v1@141.288,85.763 ; v1(157.087,68.766) 157.488,68.364 157.488,67.315 162.088,62.715 162.088,60.165 v1(162.337,59.916) ; v1(169.387,56.966) 169.447,56.906 v1@169.447,53.166
D5/SERVO: R59.1 U1.23 U5.9 | length 26.9
  Top Layer w0.145: v1(166.587,62.266) 166.691,62.37 U5.9@166.691,63.747 ; U5.9@166.691,63.746 166.691,64.671 167.653,65.634 168.303,65.634 169.436,66.766 169.436,68.346 169.812,68.722 171.186,68.722 R59.1@171.287,68.566 ; v1(168.587,53.166) 168.088,52.667 168.088,49.026 U1.23@169.447,47.666
  Bottom Layer w0.145: v1(166.587,62.266) 167.387,62.266 168.787,60.866 168.786,56.785 169.15,56.42 169.15,53.729 v1(168.587,53.166)
D6/STSW: Q1.3 Q5.3 U1.18 U5.10 | length 42.2
  Top Layer w0.145: Q5.3@139.003,62.566 Q1.3@145.603,62.566 145.603,64.381 146.688,65.466 162.685,65.466 163.094,65.872 164.181,65.872 v1(164.487,65.566) ; U5.10@165.89,63.746 165.89,64.32 167.836,66.266 167.988,66.266 v1(168.087,66.366) 168.037,66.416 168.537,66.416 169.137,67.015 169.137,68.466 169.69,69.019 170.48,69.019 U1.18@171.986,70.526
  Bottom Layer w0.145: v1(164.487,65.566) 165.087,65.566 165.887,66.366 v1(168.087,66.366)
D7/WKSW: Q3.3 U5.11 | length 21.9
  Top Layer w0.145: Q3.3@145.603,65.666 145.703,65.766 162.469,65.766 162.873,66.17 164.684,66.17 165.09,65.763 U5.11@165.09,63.746
D8/RTSW: Q4.3 U5.12 | length 24
  Top Layer w0.145: Q4.3@145.603,68.766 145.786,68.765 147.287,67.267 161.689,67.267 162.687,68.266 v1@163.086,68.367 ; v1(163.387,65.166) 164.291,64.262 U5.12@164.291,63.747
  Bottom Layer w0.145: v1@163.086,68.367 162.687,67.966 162.687,65.866 v1(163.387,65.166)
  other v1: 163.087,68.366
D9/PWM1: R26.1 R62.2 R96.2 U5.13 | length 78.4
  Top Layer w0.145: R62.2@112.987,93.466 112.388,93.165 112.388,91.765 R26.1@112.087,91.466 112.787,90.767 121.788,90.767 122.489,90.066 126.886,90.066 127.686,89.266 135.337,89.266 135.888,89.817 ; 135.889,89.818 136.29,89.818 v1(136.687,90.216) ; v1@140.386,85.766 140.386,84.216 140.884,83.718 142.334,83.718 144.836,81.216 144.836,79.466 145.936,78.367 149.886,78.367 152.487,75.766 153.488,75.766 154.887,74.366 v1(154.887,73.866) 155.687,73.066 155.687,69.716 v1(154.987,69.016) ; v1(156.487,76.866) R96.2@157.287,76.866 ; v1(158.287,64.716) 159.436,64.717 159.888,65.166 162.588,65.166 163.493,64.249 U5.13@163.493,63.746
  Bottom Layer w0.145: v1@136.688,90.117 137.488,90.117 140.686,86.916 140.686,86.065 v1@140.46,85.839 ; v1(154.887,73.866) 155.687,74.666 155.687,76.065 v1(156.487,76.866) ; v1(154.987,69.016) 156.587,67.417 156.587,66.868 158.288,65.166 v1(158.287,64.716)
  other v1: 140.387,85.766
D10: CN16.3 U1.8 U5.14 | length 32.9
  Top Layer w0.145: U5.14@162.693,63.747 162.693,63.16 162.987,62.866 163.387,62.466 v1(165.787,62.466) ; v1(171.087,59.966) 173.086,59.967 174.356,61.237 CN16.3@174.656,61.237
  Bottom Layer w0.145: v1(165.787,62.466) 166.187,62.866 167.289,62.866 170.188,59.967 v1(171.087,59.966) ; CN16.3@174.656,61.237 177.686,58.207 177.686,49.065 178.486,48.265 178.486,46.246 U1.8@179.606,45.126
D11/MOSI: P1.4 U5.15 | length 30.3
  Top Layer w0.145: P1.4@145.699,51.758 144.392,53.066 142.787,53.066 142.088,53.767 142.088,54.765 142.688,55.367 143.688,55.367 152.388,64.066 159.987,64.066 160.788,64.867 161.387,64.867 161.892,64.359 U5.15@161.892,63.746
D12/MISO: P1.1 U5.16 | length 21.8
  Top Layer w0.145: P1.1@143.159,54.298 152.608,63.747 U5.16@161.093,63.747
D13/SCK: LED.1 P1.3 U5.17 | length 34.5
  Top Layer w0.145: LED.1@138.429,54.108 140.809,54.108 P1.3@143.159,51.758 144.252,50.665 146.188,50.665 146.688,51.166 146.688,52.266 145.888,53.066 145.288,53.066 144.488,53.866 144.488,54.867 145.187,55.565 146.287,55.565 146.688,55.966 146.688,56.766 152.987,63.066 159.286,63.066 159.518,62.835 U5.17@159.518,62.156
DIR485: R93.1 U1.15 U6.15 U8.2 U8.3 | length 96.2
  Top Layer w0.145: U6.15@130.815,77.591 131.412,77.591 131.437,77.566 v1(132.187,77.566) ; v1(138.787,77.566) 139.187,77.966 139.187,85.466 140.087,86.365 141.489,86.365 144.585,83.266 145.786,83.266 146.452,83.932 U8.2@146.452,84.346 ; U8.2@146.452,84.346 U8.3@147.722,84.346 147.722,80.531 R93.1@147.787,80.466 ; 147.722,82.571 148.142,82.571 150.314,80.399 ; 150.247,80.467 153.409,77.292 154.361,77.292 157.188,74.465 164.727,74.465 165.426,73.767 165.786,73.767 166.586,74.567 170.287,74.567 170.587,74.267 171.489,74.267 172.286,75.065 176.736,75.065 178.187,73.617 178.187,72.664 177.686,72.166 177.686,71.666 178.187,71.166 178.187,69.944 179.088,69.045 179.088,67.945 178.187,67.046 178.187,57.165 177.788,56.766 176.688,56.766 v1(176.387,56.466)
  Bottom Layer w0.145: v1(132.187,77.566) v1(138.787,77.566) ; U1.15@174.526,47.666 174.526,48.207 176.787,50.467 176.787,54.262 176.188,54.867 176.188,56.266 v1(176.387,56.466)
DN1: CN8.6 TO_PC.A7 TO_PC.B7 | length 29.1
  Top Layer w0.145: CN8.6@196.317,101.606 197.287,102.576 197.287,127.601 ; TO_PC.A7@197.337,127.651 197.287,127.601 ; 198.337,127.651 198.287,127.701 198.287,128.366 198.087,128.566 197.587,128.566 197.287,128.266 197.287,127.601
DN2: CN9.6 CN10.6 DC/AUX.A7 DC/AUX.B7 | length 36.6
  Top Layer w0.145: DC/AUX.B7@196.837,47.581 196.838,46.817 197.087,46.566 197.587,46.566 197.836,46.815 197.836,47.582 197.687,50.266 197.686,54.856 CN10.6@198.857,56.026
  Bottom Layer w0.145: CN9.6@198.857,80.026 197.787,78.956 197.787,57.096 CN10.6@198.857,56.026
DP1: CN8.5 TO_PC.A6 TO_PC.B6 | length 30.2
  Top Layer w0.145: v1(196.687,126.566) 196.837,126.716 TO_PC.B6@196.837,127.651 ; CN8.5@198.857,101.606 197.587,102.876 197.587,126.266 v1(197.887,126.566) ; v1(197.887,126.566) 197.887,127.601 TO_PC.A6@197.837,127.651 197.837,126.616 v1(197.887,126.566)
  Bottom Layer w0.145: v1(196.687,126.566) v1(197.887,126.566)
DP2: CN9.5 CN10.5 DC/AUX.A6 DC/AUX.B6 | length 36.1
  Top Layer w0.145: CN10.5@196.317,56.026 197.338,55.006 DC/AUX.A6@197.337,47.581 ; 198.337,47.581 198.387,47.631 v1(198.387,48.666)
  Bottom Layer w0.145: CN9.5@196.317,80.026 197.487,78.856 197.487,57.196 CN10.5@196.317,56.026 ; v1(197.187,48.666) v1(198.387,48.666)
F3_1: F3.1 FCAN1.1 J3.1 | length 26.5
  Top Layer w0.3: J3.1@154.516,90.297 155.786,91.567 157.788,91.567 159.586,89.766 162.088,89.766 165.088,92.766 168.637,92.766 ; 168.408,92.766 168.837,92.766 169.937,91.666 169.937,90.216 171.285,88.867 FCAN1.1@174.138,88.867 ; F3.1@174.187,87.166 FCAN1.1@174.187,88.817
FCAN_1: F2.1 FCAN.1 J2.1 | length 21.4
  Top Layer w0.145: F2.1@172.787,103.566 173.587,103.566 174.438,102.715 FCAN.1@174.437,101.566
  Top Layer w0.5: J2.1@156.757,108.396 162.058,108.397 164.102,106.352 165.517,106.352 166.254,105.616 171.138,105.616 172.787,103.967 F2.1@172.787,103.566
FCAN_2: FCAN.2 R71.1 | length 1.7
  Top Layer w0.145: R71.1@171.087,101.566 FCAN.2@172.737,101.566
FGNSS_2: FGNSS.2 R64.1 | length 1.8
  Top Layer w0.145: FGNSS.2@67.137,49.666 67.137,48.116 R64.1@67.287,47.966
FINP_2: FINP.2 R73.1 | length 2
  Top Layer w0.145: FINP.2@67.637,89.166 R73.1@69.687,89.166
FROT_2: FROT.2 R75.1 | length 1.6
  Top Layer w0.145: FROT.2@186.637,70.166 186.787,70.316 R75.1@186.787,71.666
FSER_2: FSER.2 R76.2 | length 1.6
  Top Layer w0.145: FSER.2@175.837,110.666 R76.2@177.487,110.666
FWAS_2: FWAS.2 R74.1 | length 1.6
  Top Layer w0.145: R74.1@67.387,106.666 67.537,106.516 FWAS.2@67.537,105.166